# EAGLE board PCB - BOARD (EAGLE 8.2.0)
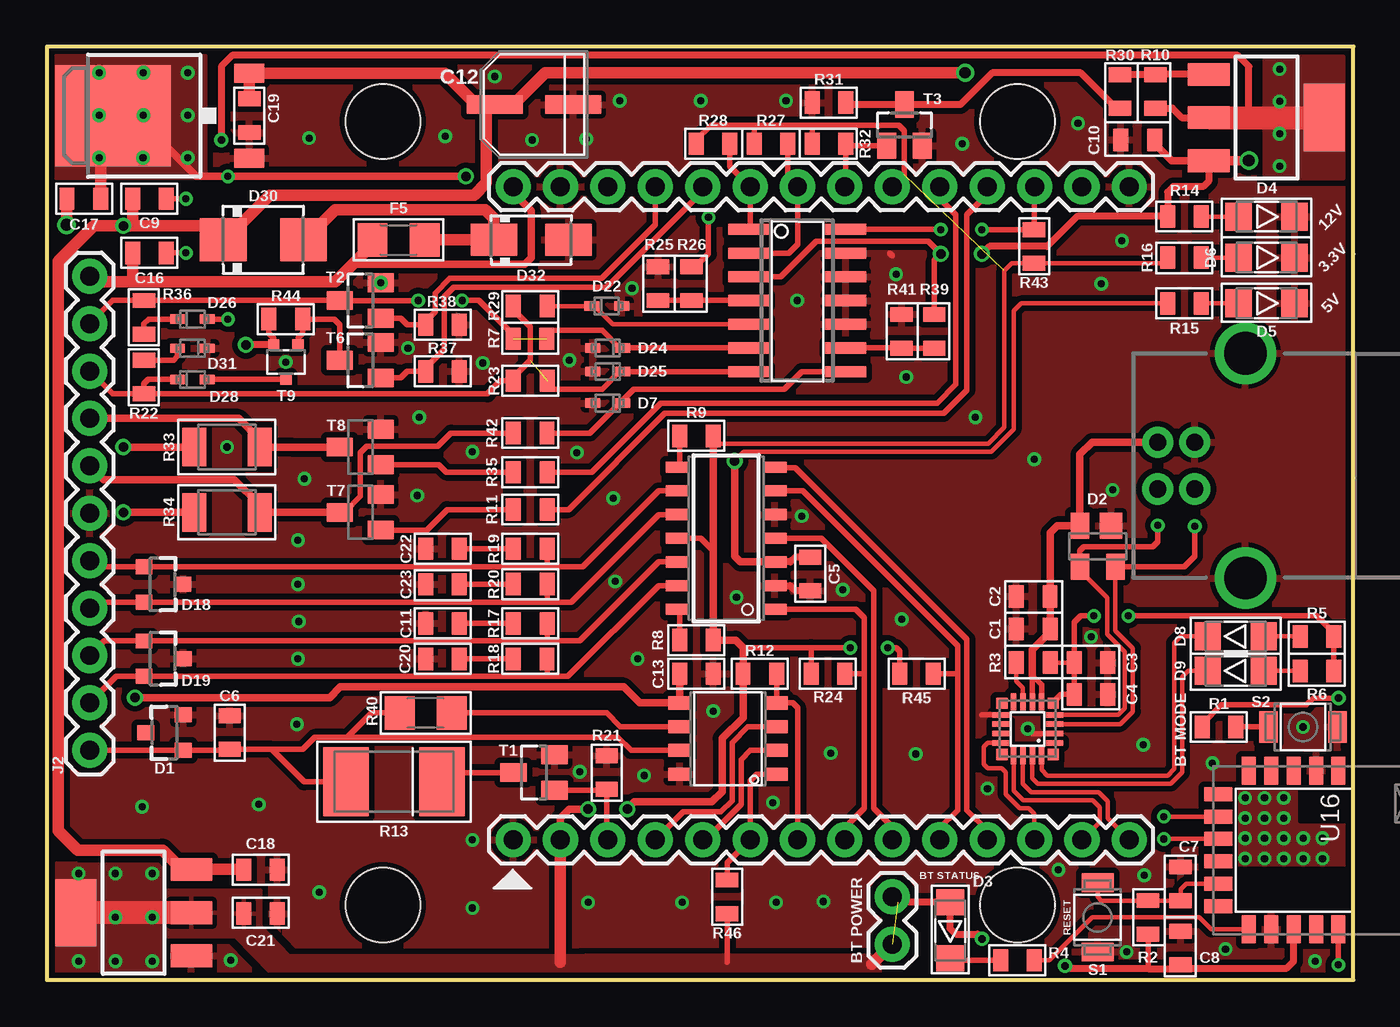
[diagram p0: board, top side]
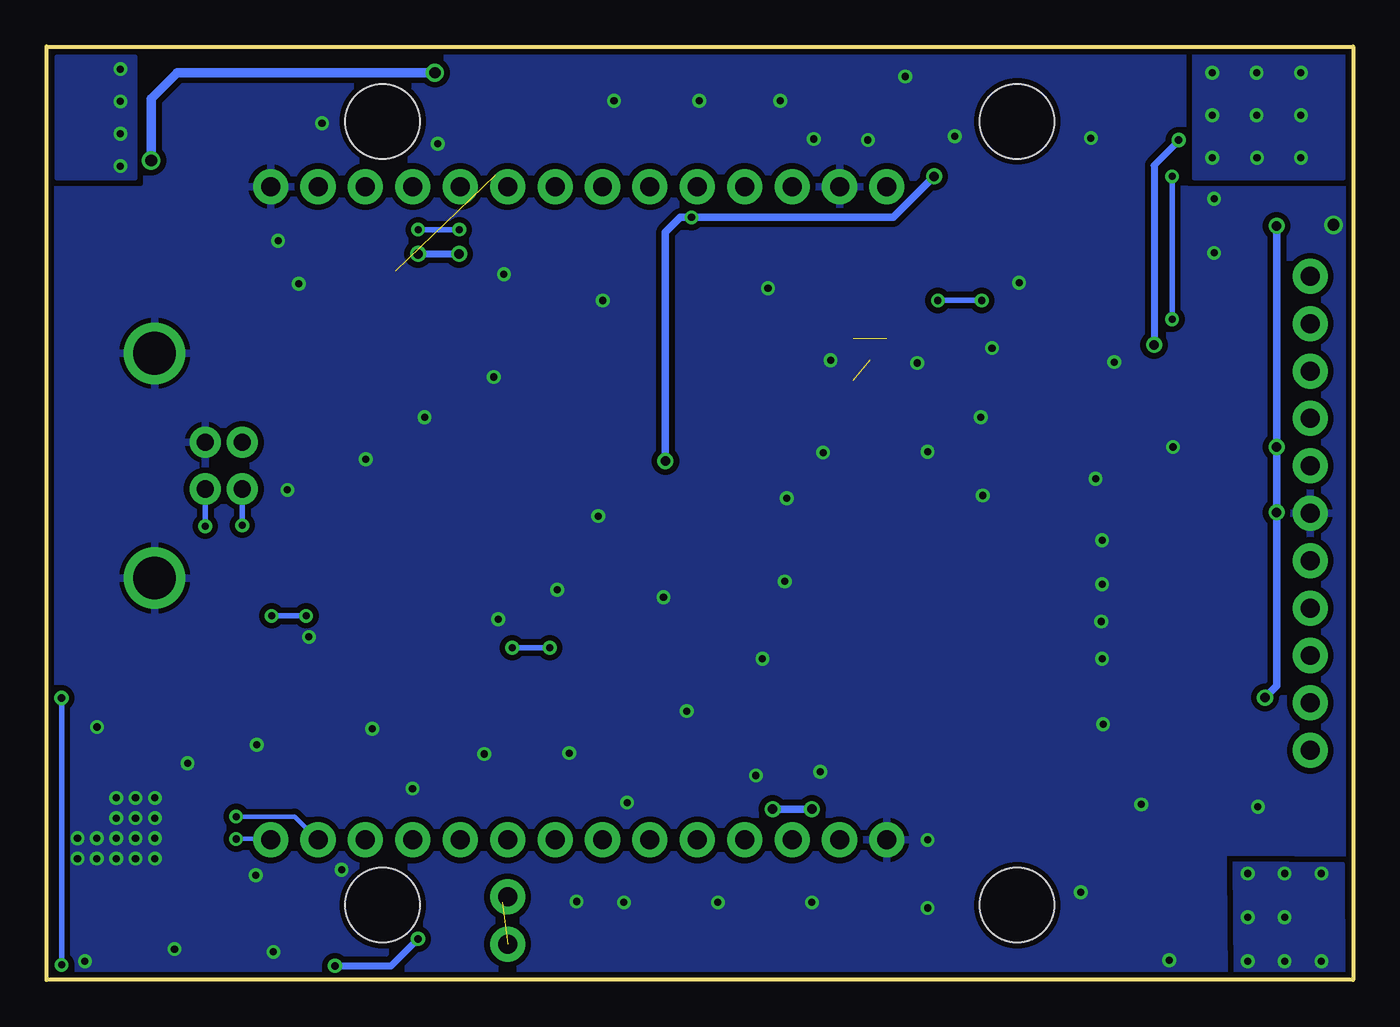
[diagram p1: board, bottom side, seen from below]

Size 70 x 50 mm. Coordinates in mm from the lower left corner, seen from the top.
Outline: 0,0 70,0 70,50 0,50 0,0
Copper layers (1*16): Top 0.035mm / dielectric 1.5mm / Bottom 0.035mm
Design rules "SparkFun-2-layer-TIGHT": minimum track width 7mil, minimum drill 15mil, track to track 7mil, track to pad 7mil, pad to pad 7mil, via to via 7mil, smd to smd 7mil, copper to edge 7mil, drill to drill 7mil, minimum pad ring 7mil, minimum via ring 7mil, stop-mask expansion 4mil, vias tented up to drill 25mil, thermal gap 10mil
Holes 4 mm at 52,46 18,46 18,4 52,4

## Footprints (pad centres in the part's own frame; a part is rotated, then mirrored left to right if it is on the bottom)
0805 = smd 0.8 x 1.2: 1 -0.9,0; 2 0.9,0
PANASONIC-C = smd 3 x 1: 1 -2.1,0; 2 2.1,0
QFN20 = smd 0.6 x 0.6: 1 -1.37,1.37; 6 -1.37,-1.37; 11 1.37,-1.37; 16 1.37,1.37 | smd 0.9 x 0.3: 2 -1.445,0.75; 3 -1.445,0.25; 4 -1.445,-0.25; 5 -1.445,-0.75; 12 1.445,-0.75; 13 1.445,-0.25; 14 1.445,0.25; 15 1.45,0.75 | smd 0.3 x 0.9: 7 -0.75,-1.445; 8 -0.25,-1.445; 9 0.25,-1.445; 10 0.75,-1.445; 17 0.75,1.445; 18 0.25,1.445; 19 -0.25,1.445; 20 -0.75,1.445
SOT23-3 = smd 0.8 x 0.9: 1 -0.95,-1; 2 0.95,-1; 3 0,1
SOT143-4 = smd 1.2 x 1.4: 1 -0.725,-1.1 | smd 1 x 1.4: 2 0.95,-1.1; 3 0.95,1.1; 4 -0.95,1.1
WL-SMCW_1206 = smd 1.4 x 1.5: 1 -1.5,0; 2 1.5,0
SOD-523F = smd 0.8 x 0.5: A -0.8,0; C 0.8,0
SOT23-3' = smd 0.8 x 0.9: 1 -0.95,-1; 2 0.95,-1; 3 0,1.1
DO214AA = smd 2.5 x 2.3: A 2.15,0; C -2.15,0
DO214AC = smd 2.5 x 1.7: A 2,0; C -2,0
1206 = smd 1.6 x 1.8: 1 -1.4,0; 2 1.4,0
SO14 = smd 0.6 x 2.2: 1 -3.81,-2.6; 2 -2.54,-2.6; 3 -1.27,-2.6; 4 0,-2.6; 5 1.27,-2.6; 6 2.54,-2.6; 7 3.81,-2.6; 8 3.81,2.6; 9 2.54,2.6; 10 1.27,2.6; 11 0,2.6; 12 -1.27,2.6; 13 -2.54,2.6; 14 -3.81,2.6
1X11 = drill 1.016 pad 1.88: 1 0,0; 2 2.54,0; 3 5.08,0; 4 7.62,0; 5 10.16,0; 6 12.7,0; 7 15.24,0; 8 17.78,0; 9 20.32,0; 10 22.86,0; 11 25.4,0
USB-B-PTH = drill 0.914 pad 1.676: D+ 4,1.25; D- 5.981,1.25; GND 4,-1.25; VBUS 5.981,-1.25 | drill 2.286: SHLD1 1.282,-6.02; SHLD2 1.282,6.02
1X02 = drill 1.016 pad 1.88: 1 0,0; 2 2.54,0
1X14 = drill 1.016 pad 1.88: 1 0,0; 2 2.54,0; 3 5.08,0; 4 7.62,0; 5 10.16,0; 6 12.7,0; 7 15.24,0; 8 17.78,0; 9 20.32,0; 10 22.86,0; 11 25.4,0; 12 27.94,0; 13 30.48,0; 14 33.02,0
3521 = smd 2.45 x 3.7: 1 -2.575,0; 2 2.575,0
1210 = smd 1.27 x 2.06: 1 -1.755,0; 2 1.755,0
B3U-WO-GT-WO-B = smd 1 x 1.7: 1 -1.85,0; 2 1.85,0
SOT23 = smd 1 x 1.4: 1 -0.95,-1.1; 2 0.95,-1.1; 3 0,1.1
SOT23-BEC = smd 1 x 1.4: B -0.95,-1.1; C 0,1.1; E 0.95,-1.1
SOT323 = smd 0.6 x 0.6: 1 -0.65,-0.925; 2 0.65,-0.925; 3 0,0.925
SO14' = smd 0.6 x 1.3: 1 -3.81,-2.6; 2 -2.54,-2.6; 3 -1.27,-2.6; 4 0,-2.6; 5 1.27,-2.6; 6 2.54,-2.6; 7 3.81,-2.6; 8 3.81,2.6; 9 2.54,2.6; 10 1.27,2.6; 11 0,2.6; 12 -1.27,2.6; 13 -2.54,2.6; 14 -3.81,2.6
SOT223 = smd 1.219 x 2.235: 1 -2.311,-3.099; 2 0,-3.099; 3 2.311,-3.099 | smd 3.6 x 2.2: 4 0,3.099
SOIC-8 = smd 0.7 x 1.2: 1 -1.905,-2.6; 2 -0.635,-2.6; 3 0.635,-2.6; 4 1.905,-2.6; 5 1.905,2.6; 6 0.635,2.6; 7 -0.635,2.6; 8 -1.905,2.6
TO-252 = smd 1 x 1.6: 1 -2.28,-4.8; 3 2.28,-4.8 | smd 5.4 x 6.2: 2 0,2.5
RN4871 = smd 1.5 x 0.75: 1 -4.25,0.95; 2 -4.25,-0.25; 3 -4.25,-1.45; 4 -4.25,-2.65; 5 -4.25,-3.85; 12 4.25,-3.85; 13 4.25,-2.65; 14 4.25,-1.45; 15 4.25,-0.25; 16 4.25,0.95 | smd 0.75 x 1.5: 6 -3,-5.5; 7 -1.8,-5.5; 8 -0.6,-5.5; 9 0.6,-5.5; 10 1.8,-5.5; 11 3,-5.5

## Placement (x,y rotation side)
C1  4.7uF  [0805]  52.85,18.8 180 top
C2  0.1uF  [0805]  52.85,20.55 180 top
C3  4.7uF  [0805]  55.95,17 0 top
C4  0.1uF  [0805]  55.95,15.3 0 top
C5  100nF  [0805]  40.9,21.75 270 top
C6  150pF  [0805]  9.8,13.25 90 top
C7  1uF 6.3v  [0805]  60.75,5.15 90 top
C8  10uF 6.3V X5R  [0805]  60.75,1.7 90 top
C9  0.1uF 25V  [0805]  5.5,41.85 0 top
C10  0.1uF 25V  [0805]  58.45,45 180 top
C11  560pF  [0805]  21.2,19.1 180 top
C12  EEE-1EA330WR  [PANASONIC-C]  26.1,46.9 180 top
C13  4.7uF 25V  [0805]  34.8,16.4 0 top
C16  10nF 100V  [0805]  5.5,38.95 0 top
C17  4.7uF  [0805]  1.98,41.85 180 top
C18  4.7uF MLCC  [0805]  11.45,5.9 0 top
C19  10uF  [0805]  10.85,46.3 270 top
C20  560pF  [0805]  21.2,17.2 180 top
C21  4.7uF MLCC  [0805]  11.45,3.55 0 top
C22  560pF  [0805]  21.2,23.1 180 top
C23  560pF  [0805]  21.2,21.2 180 top
CP1202N  CP2102N  [QFN20]  52.55,13.45 180 top
D1  MMBZ27  [SOT23-3]  6.3,13.24 90 top
D2  SP0503BAHTG  [SOT143-4]  56.3,23.23 180 top
D3  [WL-SMCW_1206]  48.4,2.65 90 top
D4  1120  [WL-SMCW_1206]  65.35,40.9 180 top
D5  330  [WL-SMCW_1206]  65.35,36.25 180 top
D6  330  [WL-SMCW_1206]  65.35,38.7 180 top
D7  BAT54XV2  [SOD-523F]  30.05,30.9 0 top
D8  [WL-SMCW_1206]  63.7,18.4 0 top
D9  [WL-SMCW_1206]  63.7,16.55 0 top
D18  PESD1CAN  [SOT23-3']  6.2,21.19 270 top
D19  PESD1CAN  [SOT23-3']  6.21,17.21 270 top
D22  BAT54XV2  [SOD-523F]  30,36.1 180 top
D24  BAT54XV2  [SOD-523F]  30.05,33.85 0 top
D25  BAT54XV2  [SOD-523F]  30.05,32.6 0 top
D26  BAT54XV2  [SOD-523F]  7.8,35.4 180 top
D28  BAT54XV2  [SOD-523F]  7.8,32.17 180 top
D30  S2A  [DO214AA]  11.6,39.65 0 top
D31  BAT54XV2  [SOD-523F]  7.8,33.84 0 top
D32  SMAJ15CA  [DO214AC]  25.95,39.65 0 top
F5  MF-NSMF020-2  [1206]  18.85,39.65 0 top
IC2  LM339D  [SO14]  40.2,36.4 270 top
J2  [1X11]  2.3,12.3 90 top
J3  USB_B_PTH  [USB-B-PTH]  65.5,27.55 180 top
J4  [1X02]  45.3,4.45 270 top
J5  [1X14]  58,7.5 180 top
J6  [1X14]  58,42.5 180 top
R1  4.7k 1%  [0805]  62.8,13.55 180 top
R2  4.7k  [0805]  59,3.35 270 top
R3  1K  [0805]  52.85,17 180 top
R4  330  [0805]  52,1.05 180 top
R5  330  [0805]  68.05,18.4 0 top
R6  330  [0805]  68.05,16.55 0 top
R7  10k  [0805]  25.89,34.35 0 top
R8  10k  [0805]  34.8,18.2 0 top
R9  10k  [0805]  34.8,29.15 0 top
R10  240  [0805]  59.4,47.6 270 top
R11  1k  [0805]  25.9,25.2 180 top
R12  1k  [0805]  38.2,16.4 180 top
R13  3521130RFT  [3521]  18.6,10.61 180 top
R14  1240  [0805]  60.95,40.9 180 top
R15  280  [0805]  60.95,36.25 180 top
R16  120  [0805]  60.95,38.7 180 top
R17  100  [0805]  25.9,19.1 0 top
R18  100  [0805]  25.9,17.2 0 top
R19  100  [0805]  25.9,23.1 0 top
R20  100  [0805]  25.9,21.2 0 top
R21  10k  [0805]  30,11.11 90 top
R22  10k  [0805]  5.2,32.3 270 top
R23  10k  [0805]  25.9,32.1 180 top
R24  1k  [0805]  41.85,16.4 180 top
R25  8k  [0805]  32.75,37.3 270 top
R26  2k  [0805]  34.55,37.3 90 top
R27  10k  [0805]  38.8,44.8 180 top
R28  10k  [0805]  35.7,44.8 180 top
R29  10k  [0805]  25.9,36.1 0 top
R30  866  [0805]  57.5,47.6 90 top
R31  374  [0805]  41.9,47 0 top
R32  100k  [0805]  41.9,44.8 180 top
R33  510 0.5W  [1210]  9.65,28.55 180 top
R34  510 0.5W  [1210]  9.65,25.05 180 top
R35  1k  [0805]  25.9,27.2 180 top
R36  10k  [0805]  5.2,35.5 270 top
R37  100k  [0805]  21.2,32.6 180 top
R38  100k  [0805]  21.2,35.1 180 top
R39  10k  [0805]  47.55,34.75 90 top
R40  6.49k 0.12W  [1206]  20.3,14.3 180 top
R41  10k  [0805]  45.8,34.75 270 top
R42  10k  [0805]  25.9,29.3 0 top
R43  10k  [0805]  52.9,39.3 270 top
R44  1.5k  [0805]  12.8,35.4 180 top
R45  1k  [0805]  46.6,16.4 180 top
R46  1k  [0805]  36.45,4.45 270 top
S1  [B3U-WO-GT-WO-B]  56.3,3.35 90 top
S2  [B3U-WO-GT-WO-B]  67.3,13.55 180 top
T1  2N7002P  [SOT23]  26.1,11.11 90 top
T2  2N7002P  [SOT23]  16.8,36.4 90 top
T3  2N7002P  [SOT23]  45.95,45.8 0 top
T6  2N7002P  [SOT23]  16.8,33.2 90 top
T7  MMBT3904  [SOT23-BEC]  16.8,25.05 90 top
T8  MMBT3904  [SOT23-BEC]  16.8,28.55 90 top
T9  RU1E002SPTCL  [SOT323]  12.81,33.1 180 top
U1  TJA1048T  [SO14']  36.4,23.66 90 top
U9  LM317  [SOT223]  65.35,46.2 270 top
U10  TH8056-KDC-A8  [SOIC-8]  36.5,12.93 90 top
U15  NCP1117  [TO-252]  6.05,46.3 90 top
U16  BM71BLES1FC2  [RN4871]  68.25,6.95 270 top
U19  ZLDO1117  [SOT223]  4.65,3.6 90 top

## Library data of the parts
C1-C11 C13 C16-C23 = SparkFun-Capacitors; PROD_ID: CAP-11625
C12 CP1202N D1 D2 D7 D22 D24-D26 D28 D31 R13 U1 U10 U16 = prywatne
D3-D6 D8 D9 = EAGLE-COLOR_LED-rev17b
D18 D19 = SparkFun-DiscreteSemi; PROD_ID: DIO-12501
D30 = s2x_10; MF: Fairchild; MPN: S2A; OC_FARNELL: 1467485; OC_NEWARK: 58K2391
D32 = smaj_10; MF: Littelfuse; MPN: SMAJ15CA; OC_FARNELL: 1827670; OC_NEWARK: 71J1959
F5 = SparkFun-Fuses; PROD_ID: RES-11150
IC2 = linear
J2 J4-J6 = SparkFun-Connectors
J3 = SparkFun-Connectors; PROD_ID: CONN-08278; SF_ID: PRT-00139
R1-R12 R14-R32 R35-R39 R41-R46 = SparkFun-Resistors; PROD_ID: RES-11622
R33 R34 = SparkFun-Resistors; PROD_ID: RES-12374
R40 = SparkFun-Resistors; PROD_ID: RES-08705
S1 S2 U15 U19 = Goodies
T1-T3 T6 T9 = nxp_60
T7 T8 = transistor (2)
U9 = SparkFun-IC-Power

## Nets
3.3V: C8.1 C21.1 D3.2 J4.1 J4.2 J5.13 J6.6 R2.2 R8.2 R9.2 R12.2 R16.2 R24.2 R27.2 R28.2 R32.2 R43.2 R45.2 R46.2 U1.11 U16.14 U19.2 U19.4
5V: C5.1 C17.1 D26.A R15.2 R26.2 U1.3 U15.2
!ISO_K_TX: J6.4 R11.1
!ISO_L_TX: J6.5 R35.1
!ISO_RX: IC2.14 J6.3 R43.1
!J1850_BUS-_TX: J6.11 R38.2 T2.1
!UART_CTS: CP1202N.15 J5.3
ADJ: R10.1 R30.2 U9.1
COMPARATOR+: D22.C IC2.5 R29.2
COMPARATOR-: IC2.4 R25.2 R26.1
D+: CP1202N.4 D2.4 J3.D+
D-: CP1202N.5 D2.3 J3.D-
DLC: C9.1 C10.1 C12.2 C13.1 C18.1 C19.1 D30.C IC2.3 R14.2 R33.2 R34.2 R39.2 U9.3 U10.5 U15.3 U19.3
DLC_RAW: C16.1 F5.1 J2.11 J6.14
DLC_RAW2: D30.A D32.C F5.2
GND: C1.2 C2.2 C3.2 C4.2 C5.2 C6.2 C7.2 C8.2 C9.2 C10.2 C11.2 C12.1 C13.2 C16.2 C17.2 C18.2 C19.2 C20.2 C21.2 C22.2 C23.2 CP1202N.3 CP1202N.12 D1.2 D2.1 D4.1 D5.1 D6.1 D7.A D18.3 D19.3 D22.A D24.A D25.A D31.C D32.A IC2.10 IC2.11 IC2.12 IC2.13 J2.6 J3.GND J3.SHLD1 J3.SHLD2 J5.14 J6.1 J6.13 R21.2 R25.1 R31.1 R37.1 R38.1 R41.1 S1.1 S2.1 T1.2 T2.2 T3.2 T6.2 T7.E T8.E U1.2 U1.5 U10.8 U15.1 U16.2 U16.13 U19.1
HS_CAN_H: D18.2 J2.4 R20.2 U1.10
HS_CAN_L: D18.1 J2.5 R19.2 U1.9
HS_CAN_RX: J5.4 U1.7
HS_CAN_TX: J5.5 R45.1 U1.6
J1850_BUS+: D25.C D28.C IC2.7 J2.9 R22.2 R23.1 R23.2 R29.1
J1850_BUS+_TX: J6.10 R37.2 T6.1
J1850_BUS-: D24.C IC2.6 J2.10 R7.1 R7.2 R36.1 T2.3
K-LINE: D7.C IC2.8 R42.2
K_LINE: J2.7 R34.1 R42.1 T7.C
L_LINE: J2.8 R33.1 T8.C
LED: R4.1 U16.12
LOAD: R40.1 U10.6
MS_CAN_H: D19.2 J2.2 R18.2 U1.13
MS_CAN_L: D19.1 J2.3 R17.2 U1.12
MS_CAN_RX: J5.6 U1.4
MS_CAN_TX: J5.7 R24.1 U1.1
N$1: R44.1 T6.3 T9.1
N$2: R1.1 S2.2
N$3: CP1202N.20 D8.1
N$5: D26.C R36.2
N$6: D3.1 R4.2
N$8: IC2.9 R39.1 R41.2
N$9: D28.A T9.3
N$11: D31.A R22.1
N$12: R35.2 T8.B
N$13: R13.1 T1.3
N$14: R11.2 T7.B
N$15: R30.1 R31.2 T3.3
N$17: C11.1 R17.1
N$25: C20.1 R18.1
N$26: C22.1 R19.1
N$27: C23.1 R20.1
N$29: D6.2 R16.1
N$30: D5.2 R15.1
N$32: D4.2 R14.1
N$39: C7.1 R2.1 S1.2 U16.10
N$42: R1.2 U16.16
N$45: CP1202N.9 R3.2
N$46: CP1202N.19 D9.1
N$47: D8.2 R5.1
N$49: D9.2 R6.1
PWM/!VPW: J6.7 R32.1 T3.1
PWM_RX: IC2.1 J6.9 R28.1
STBN_1: R8.1 U1.14
STBN_2: R9.1 U1.8
SW_CAN: C6.1 D1.1 J2.1 R13.2 R40.2 U10.7
SW_CAN_LOAD: J5.12 R21.1 T1.1
SW_CAN_MODE0: J5.10 U10.2
SW_CAN_MODE1: J5.11 U10.3
SW_CAN_RX: J5.8 R12.1 U10.4
SW_CAN_TX: J5.9 R46.1 U10.1
UART_RX: CP1202N.18 J5.1 U16.8
UART_TX: CP1202N.17 J5.2 U16.7
V_J1850: R10.2 R44.2 T9.2 U9.2 U9.4
VBUS: C1.1 C2.1 CP1202N.7 CP1202N.8 D2.2 J3.VBUS
VDD_CP: C3.1 C4.1 CP1202N.6 R3.1 R5.2 R6.2
VPW_RX: IC2.2 J6.8 R27.1

## Tracks (layer width: path | path; a pad name or v marks a point on that pad's centre or on a via)
3.3V  (via drill 0.38, 0.41, 0.51)  (2 unrouted)
  Top 0.254: 35.75,27.75 35.7,27.8 | R43.2 | R43.2 | 35.7,28.75 35.72,28.73 50.43,28.73 51.3,29.6 51.3,38 51.7,38.4 R43.2 | R43.2 59.75,38.4 R16.2
  Top 0.305: R28.2 34.8,45 35.6,45.8 37.9,45.8 | U1.11 35.04,23.66 35.7,23 | 37.3,17.8 40.95,17.8 | 40.95,17.8 v43.05,17.8 | v45.05,17.8 45.5,17.8 45.7,17.6 R45.2 | 40.95,17.8 R24.2 | 40.95,45.8 37.9,45.8 | 40.95,45.8 45.65,45.8 45.95,45.5 45.95,43.15 J6.6 | R27.2 37.9,45.8 | R32.2 41,45.75 40.95,45.8 | R46.2 36.45,0.95 | R2.2 59,0.6 | R8.2
  Top 0.381: 35.7,27.8 | 35.7,27.8 | 27.52,7.64 J5.13 | U16.14 66.8,1 66.4,0.6 60.95,0.6 C8.1 60.75,0.6 59,0.6 54.7,0.6 v54.55,0.75 | v50.1,2.2 49.85,2.45 48.7,2.45 48.4,2.75 D3.2 45.6,4.15 J4.1 | R8.2
  Top 0.406: R12.2 37.3,17.8 36.9,18.2 R8.2 35.7,23 35.7,27.8 35.7,28.75 R9.2 | R12.2 | J5.13 27.52,8.67 28,9.15 v29,9.15 | v31.1,9.15 31.48,9.53 35.63,9.53 36.18,10.08 36.18,12.94 37.3,14.05 R12.2 | R28.2 34.75,44.85 34.7,44.8 | R9.2 | R28.2 34.8,44.6
  Top 0.508: R8.2
  Top 0.61: J5.13 27.52,0.97 27.5,0.95 | J4.2 45.26,1.91 44.2,0.85
  Top 1.22: U19.2 U19.4
  Bottom 0.305: v43.05,17.8 v45.05,17.8
  Bottom 0.381: v54.55,0.75 51.55,0.75 v50.1,2.2
  Bottom 0.406: v29,9.15 v31.1,9.15
  other vias: 5.65,5.7 3.67,5.7 3.67,1 5.65,1 1.7,1 1.7,5.7 3.67,3.35 5.65,3.35
  pour Top (isolate 0.305, no thermals): 6.2,6.23 0.52,6.23 0.52,0.33 6.2,0.33
  pour Bottom (isolate 0.305, no thermals): 6.35,6.28 0.57,6.23 0.52,0.33 6.3,0.38
  pour Top (isolate 0.305): 6.25,2.3 10.1,2.3 12,0.35 44.65,0.3 44.65,1.35 13,1.3 11.45,2.9 11.45,4.8 6.25,4.8
5V  (via drill 0.38, 0.51)
  Top 0.254: v36.85,27.8 37.35,28.3 50.61,28.3 51.8,29.49 51.8,35.85 52.2,36.25 R15.2
  Top 0.305: D26.A v9.7,35.4 | R26.2 | v35.45,40.85 35.45,38.9 34.75,38.2 R26.2
  Top 0.381: U1.3 39.84,22.39 40.1,22.65 C5.1
  Top 0.406: U1.3 37.16,22.39 36.85,22.7 v36.85,27.8 | 4.75,46.3 8,43.05 v9.7,43.05 v22.45,43.05
  Top 0.508: 5.5,46.3 4.75,46.3 U15.2
  Top 0.61: C17.1 2.88,43.97 v2.8,44.05
  Bottom 0.305: v9.7,35.4 v9.7,43.05
  Bottom 0.406: v22.45,43.05 24.65,40.85 v35.45,40.85 36.05,40.85 36.85,40.05 v36.85,27.8
  other vias: 2.8,48.6 5.17,48.6 7.55,48.6 2.8,46.33 5.17,46.33 5.15,44.05 7.55,46.33 7.55,44.05
  pour Top (isolate 0.305, no thermals): 0.5,49.5 8.5,49.5 8.5,42.95 0.5,42.95
  pour Bottom (isolate 0.305): 0.5,49.5 8.55,49.5 8.55,42.95 0.5,42.95
!ISO_K_TX
  Top 0.305: J6.4 50.38,42.08 49.3,41 49.3,31.6 48.05,30.35 33.1,30.35 27.95,25.2 R11.1 | 26.8,25.4 R11.1 | R11.1
!ISO_L_TX
  Top 0.305: J6.5 47.84,41.86 48.7,41 48.7,31.9 47.7,30.9 32.9,30.9 29.2,27.2 R35.1 | R35.1 | R35.1
!ISO_RX  (via drill 0.38)
  Top 0.305: R43.1 | v50.1,40.2 R43.1 | R43.1 52.9,42.48 J6.3 | IC2.14 v47.89,40.21 v47.9,40.2
  Bottom 0.305: v47.9,40.2 v50.1,40.2
!J1850_BUS-_TX
  Top 0.305: T2.1 18.95,35.45 19.3,35.1 R38.2 | R38.2 | R38.2 20.3,35.3 20.81,35.81 20.81,36.79 21.6,37.58 29.73,37.58 32.6,40.45 J6.11
!UART_CTS
  Top 0.254: CP1202N.15 50.4,12.7 50.2,12.5 50.2,11.55 50.4,11.35 51.15,11.35 51.37,11.13 51.37,9.95 52.13,9.19 52.61,9.19 52.9,8.9 52.9,7.52 J5.3
ADJ
  Top 0.381: 62.24,48.5 U9.1 59.41,48.51 R10.1 R30.2
COMPARATOR+
  Top 0.254: IC2.5 30.32,35.13 29.35,36.1 D22.C | R29.2 D22.C | D22.C
COMPARATOR-
  Top 0.305: R25.2 R26.1 IC2.4
D+  (via drill 0.38)
  Top 0.254: CP1202N.4 57.51,13.7 58.18,14.37 58.18,17.77 57.25,18.7 D2.4
  Top 0.305: D2.4 60.93,22.13 61.5,22.7 v61.5,24.3
  Bottom 0.305: J3.D+ v61.5,24.3
D-  (via drill 0.38)
  Top 0.254: CP1202N.5 57.4,14.2 57.75,14.55 57.75,17.59 56.82,18.52 56.82,20.48 55.35,21.95 D2.3
  Top 0.305: D2.3 55.35,23 55.55,23.2 59.25,23.2 59.52,23.47 v59.52,24.35
  Bottom 0.305: J3.D- v59.52,24.35
DLC  (via drill 0.51, 0.61, 0.64)
  Top 0.254: 50,38.8 v50.1,38.9 | U9.3 61.8,43.89 61.65,43.74
  Top 0.305: IC2.3 39.32,37.67 41.23,39.58 47.22,39.58 v47.9,38.9 47.55,38.55 R39.2
  Top 0.381: v50.1,38.9 50.5,39.3 53.6,39.3 55.2,40.9 R14.2 60.05,42.2 60.35,42.5 61.95,42.5 62.25,42.8 U9.3 62.15,43.79 | 61.6,43.79 61.55,43.84
  Top 0.406: 0.6,10.7 0.7,10.6 | C13.1 U10.5 31.77,14.84 30.9,15.7 15.72,15.7 15.15,15.12 v4.72,15.12 | 61.55,43.84 61.5,43.89 | 61.65,43.74 61.6,43.79 | U9.3 60.26,43.89 59.35,44.8 C10.1 | R34.2 v4.1,25.05 | R33.2 v4.1,28.55
  Top 0.508: v64.4,43.9 62.26,43.9 U9.3
  Top 0.61: U19.3 | U19.3 7.56,6.1 | U19.3 7.24,5.92 6.2,6.95 1.65,6.95 0.6,8 0.6,10.7 0.6,38.5 2.5,40.4 v4.1,40.4 4.65,40.4 | U19.3 10.54,5.92 C18.1 | D30.C 8.7,40.4 4.65,40.4 | D30.C 9.45,39.75 | 11.18,48.58 U15.3 | D30.C 9.55,39.65 11.95,42.05 22.9,42.05 23.55,42.7 23.55,46.6 23.85,46.9 C12.2 | C9.1 4.6,40.45 4.65,40.4 | U15.3 C19.1 | C19.1 | v49.2,48.6 26.7,48.6 25,46.9 C12.2 | U15.3 21.32,48.58 23,46.9 C12.2
  Bottom 0.381: v50.1,38.9 v47.9,38.9
  Bottom 0.406: v4.72,15.12 4.1,15.75 v4.1,25.05 v4.1,28.55 v4.1,40.4
  Bottom 0.508: v49.2,48.6 63,48.6 64.4,47.2 v64.4,43.9
DLC_RAW
  Top 0.406: J6.14 24.98,42.17 25.95,41.2 25.95,38.7 25.6,38.35 16.4,38.35 16.02,37.98
  Top 0.61: J2.11 2.6,37.4 4.65,37.4 | C16.1 4.6,37.45 4.65,37.4 | 4.65,37.4 15.45,37.4 16.02,37.98 17.45,39.4 F5.1
DLC_RAW2
  Top 0.61: F5.2 D32.C | D30.A 13.85,39.65 15.45,41.25 23.5,41.25 23.95,40.8 D32.C | D32.C 23.55,39.65
GND  (via drill 0.38, 0.64)
  Top 0.305: 9.75,14.2 C6.2 | IC2.13 | IC2.11 | 45.16,38.94 45.3,38.8 | C16.2 v7.45,38.95 | v7.45,38.95 | CP1202N.3 52.8,13.2 v52.55,13.45 | CP1202N.12 50.1,14.2 | C9.2 v7.45,41.85 | v7.45,41.85
  Top 0.381: 42.8,38.9 42.9,39 | 42.8,37.8 42.9,37.7 | 42.8,35.2 42.85,35.15 | U1.2 39.83,21.12 40.1,20.85 C5.2
  Top 0.406: 42.75,35.13 IC2.10
  Top 0.61: C17.2 1.08,40.48 v1.05,40.45
  other vias: 13.45,17.2 13.5,19.2 35.7,14.4 42.65,20.9 13.45,21.2 19.85,25.95 19.35,33.85 30.45,21.35 31.65,17.2 17.9,37.35 23.35,33.05 12.8,33.1 46.05,32.3 30.7,47.1 35.03,47.1 39.6,47.1 49.05,44.8 26,45 28.9,45.05 40.45,24.85 42,12.15 55.25,45.9 29,4.15 41.61,4.2 45.8,19.32 46.55,12.1 34.04,4.15 39.07,4.15 5.11,9.28 14.6,4.7 11.35,9.4 22.8,7.5 22.8,3.85 28.55,11.15 32,10.95 13.4,13.7 40.2,36.4 36.95,20.5 45.5,37.8 9.85,1.05 31.35,37.05 58.75,12.6 55.95,18.38 52.9,27.9 57.6,39.6 56.5,37.3 57.1,26.25 50.4,10.25 14.05,45.1 21.35,45.2 19.95,30.15 49.75,30.15 38.9,9.5 30.35,25.8 28.4,28.25 28,33.2 22.8,28.3 13.45,23.55 13.8,26.85 9.65,28.55 63.15,1.65 58.8,5.6 57.85,1.5 67.3,13.55 62.45,11.6 54.2,5.9 67.95,1 64.2,9.75 64.2,8.67 65.24,8.67 65.24,9.75 66.28,9.75 66.28,8.67 66.28,7.58 66.28,6.5 67.31,6.5 68.35,6.5 68.35,7.58 67.31,7.58 65.24,7.58 65.24,6.5 64.2,6.5 64.2,7.58 24,48.4
  pour Bottom (isolate 0.305, rank 2): -1,51 72,51 72,-1 -1,-1
  pour Top (isolate 0.305, rank 2): -2,52 73,52 73,-2 -2,-2
HS_CAN_H
  Top 0.305: 26.8,20.24 28.09,20.24 32.78,24.93 U1.10 | 26.8,20.24 D18.2 2.62,20.24 J2.4 | 26.8,20.24 R20.2 | R20.2
HS_CAN_L
  Top 0.305: 26.8,22.14 D18.1 2.62,22.14 J2.5 | 26.8,22.14 28.72,22.14 32.78,26.2 U1.9 | 26.8,22.14 R19.2
HS_CAN_RX
  Top 0.305: J5.4 50.38,8.02 49.3,9.1 49.3,18.25 40.1,27.45 39.02,27.45 U1.7
HS_CAN_TX
  Top 0.305: J5.5 47.84,8.14 48.8,9.1 48.8,16.4 | 39.04,26.16 U1.6 40.5,26.2 48.8,17.9 48.8,16.4 | 48.8,16.4 R45.1
J1850_BUS+  (1 unrouted)
  Top 0.305: 37.59,32.6 IC2.7 30.86,32.59 D25.C | R22.2 3.52,31.4 J2.9 | R22.2 5.2,31.95 5.42,32.17 D28.C | 26.8,31.95 R23.1 26.8,31.65 29.2,31.65 | R22.2 23.6,31.4 24.3,32.1 R23.2 25,32.3 25.9,33.2 25.9,35 25,35.9 R29.1 | 29.45,31.65 29.2,31.65 | 30.75,32.6 D25.C | 29.2,31.65 29.75,31.65 30.7,32.6 D25.C
J1850_BUS+_TX
  Top 0.305: T6.1 18.95,32.25 19.3,32.6 R37.2 | R37.2 | J6.10 35.14,42.24 30,37.1 21.8,37.1 21.29,36.59 21.29,33.79 20.3,32.8 R37.2
J1850_BUS-  (via drill 0.38)  (1 unrouted)
  Top 0.305: T2.3 R36.1 3.54,36.4 J2.10 | T2.3 | T2.3 | v19.9,36.4 T2.3 | v19.9,36.4 | v22.25,36.4 23.15,36.4 25,34.55 R7.1 | R7.2 26.8,34.8 29.1,34.8 | 29.1,34.8 29.25,34.8 | IC2.6 D24.C 30.7,33.85 29.75,34.8 29.1,34.8
  Bottom 0.305: v19.9,36.4 v22.25,36.4
K-LINE
  Top 0.305: IC2.8 | 26.8,29.45 R42.2 29.1,29.3 30.7,30.9 | 30.7,30.9 D7.C | 30.7,30.9 31.45,31.65 38.5,31.65 | 38.5,31.65 38.7,31.65 | IC2.8 40.44,32.59 39.5,31.65 38.5,31.65
K_LINE
  Top 0.305: T7.C 15.95,25.05 16.8,25.9 16.8,28.25 17.15,28.6 20.95,28.6 21.65,29.3 R42.1
  Top 0.406: T7.C R34.1 11.4,25.45 10.05,26.8 3.04,26.8 J2.7
L_LINE
  Top 0.406: 13.1,28.55 R33.1 11.4,28.95 10.27,30.08 J2.8 | 13.1,28.55 | 13.1,28.55 T8.C
LED
  Top 0.254: U16.12 62.4,2.7 61.75,3.35 56,3.35 53.7,1.05 R4.1
LOAD
  Top 0.305: U10.6 30.73,13.56 30,14.3 R40.1
MS_CAN_H
  Top 0.305: U1.13 32.78,21.12 27.92,16.26 26.8,16.26 | 26.8,16.26 D19.2 3.72,16.26 J2.2 | 26.8,16.26 R18.2
MS_CAN_L
  Top 0.305: U1.12 32.78,22.39 28.55,18.16 26.8,18.16 | 26.8,18.16 D19.1 3.08,18.16 J2.3 | 26.8,18.16 R17.2 | R17.2
MS_CAN_RX
  Top 0.305: J5.6 45.3,8.2 44.3,9.2 44.3,20.85 41.49,23.66 U1.4
MS_CAN_TX
  Top 0.305: J5.7 42.76,8.16 43.8,9.2 43.8,10 43.8,16.35 | 43.8,16.35 43.8,19.4 43.35,19.85 U1.1 | R24.1 43.75,16.4 43.8,16.35
N$1
  Top 0.305: 15.7,34.4 T6.3 | R44.1 | 15.7,34.4 15.7,35.1 15.4,35.4 R44.1 | 15.7,34.4 | T9.1 13.46,34.41 13.7,34.65 R44.1 | R44.1
N$2
  Top 0.305: R1.1 S2.2
N$3
  Top 0.254: CP1202N.20 53.3,11.25 53.6,10.95 60.05,10.95 60.4,11.3 60.4,18.05 60.75,18.4 D8.1
N$5
  Top 0.305: R36.2 5.2,35.15 5.45,35.4 D26.C
N$6
  Top 0.254: R4.2
  Top 0.305: R4.2 48.5,1.05 D3.1
N$8
  Top 0.305: IC2.9 R41.2 R39.1
N$9
  Top 0.305: T9.3 D28.A
N$11
  Top 0.305: D31.A 7,33.4 6.8,33.2 R22.1
N$12
  Top 0.305: R35.2 24.95,27.15 24.9,27.2 21.4,27.2 21,27.6 T8.B | R35.2
N$13
  Top 0.305: T1.3 | T1.3 21.68,11.11 R13.1
N$14
  Top 0.305: T7.B 20.35,24.1 21.45,25.2 24.9,25.2 24.95,25.15
  Top 0.406: 18.15,24.1 T7.B | 24.95,25.15 R11.2
N$15
  Top 0.381: R30.1 57.3,46.7 55.4,48.6 50.65,48.6 49.65,47.6 48.95,46.9 T3.3 42.9,46.9 R31.2
N$17
  Top 0.305: C11.1 R17.1
N$20
  cutout Top: 63.75,5.95 69.55,5.95 69.55,3.7 63.75,3.7
N$25
  Top 0.305: C20.1 R18.1 | R18.1
N$26
  Top 0.305: C22.1 R19.1
N$27
  Top 0.305: C23.1 R20.1
N$29
  Top 0.254: R16.1 D6.2 | D6.2
N$30
  Top 0.254: D5.2 R15.1
N$32
  Top 0.254: D4.2 R14.1
N$39
  Top 0.254: S1.2 56.3,4.45 56.5,4.25 R2.1 C7.1 60.75,4.85 61.05,5.15 U16.10
N$42  (via drill 0.38, 0.41)
  Top 0.305: U16.16 v69.2,0.8 | R1.2 | R1.2 61.9,13.7 62.93,14.73 67.48,14.73 67.85,15.1 v69.2,15.1
  Bottom 0.305: v69.2,0.8 v69.2,15.1
N$45
  Top 0.254: CP1202N.9 52.3,15.65 51.95,16 R3.2 | R3.2
N$46
  Top 0.254: CP1202N.19 52.8,10.8 53.08,10.52 60.23,10.52 60.83,11.12 60.83,16.23 61.15,16.55 D9.1
N$47
  Top 0.254: D8.2 R5.1
N$49
  Top 0.254: D9.2 R6.1
N$57
  cutout Top: 0.55,42.45 0.5,37.9 7.95,37.9 8,42.45
N$58
  cutout Top: 67.15,10.35 69.55,10.35 69.55,8.5 67.15,8.5
PWM/!VPW
  Top 0.305: J6.7 42.8,42.54 R32.1 42.9,44.7 T3.1
PWM_RX
  Top 0.305: IC2.1 37.68,40.29 J6.9 36.6,43.58 R28.1
STBN_1
  Top 0.305: R8.1 33.9,19.75 U1.14
STBN_2
  Top 0.305: R9.1 33.9,27.57 U1.8
SW_CAN
  Top 0.305: J2.1 D1.1 9.75,12.29 C6.1 12.05,12.35 | U10.7 31.3,12.3 30.6,13 16.1,13 | 12.05,12.35 13.7,12.35 14.35,13 16.1,13 | R40.2 17.4,14.3 16.1,13 | R13.2 13.79,10.61 12.05,12.35
SW_CAN_LOAD
  Top 0.305: R21.1 29.95,10.16 | R21.1 30,7.56 J5.12 | 29.95,10.16 R21.1 | T1.1 30,10.16 R21.1
SW_CAN_MODE0
  Top 0.305: J5.10 35.3,7.5 37.2,9.4 37.2,11.8 37.7,12.29 U10.2
SW_CAN_MODE1
  Top 0.305: J5.11 34.1,9 36.12,9 36.72,9.6 36.72,12.71 37.56,13.56 U10.3
SW_CAN_RX
  Top 0.305: J5.8 40.22,14.58 39.97,14.84 U10.4 R12.1
SW_CAN_TX
  Top 0.305: U10.1 38.02,11.03 37.68,10.68 J5.9 36.45,6.27 R46.1
UART_RX  (via drill 0.38)
  Top 0.254: 52.34,11.96 CP1202N.18 52.3,10.5 52.75,10.05 56.35,10.05 56.83,9.57 56.83,8.67 J5.1 | U16.8 v59.85,7.55
  Bottom 0.254: v59.85,7.55 58.05,7.55 J5.1
UART_TX  (via drill 0.38)
  Top 0.254: J5.2 56.4,8.45 56.4,9.25 56.03,9.62 52.31,9.62 51.8,10.13 CP1202N.17 51.84,11.96 51.8,11.91 | U16.7 v59.85,8.75
  Bottom 0.254: J5.2 56.71,8.75 v59.85,8.75
V_J1850  (via drill 0.38, 0.4, 0.51)
  Top 0.305: T9.2 12.16,34.39 11.9,34.65 R44.2 | R44.2
  Top 0.381: U9.2 60.8,46.2 60.3,46.7 R10.2 | T9.2 v10.66,34.02 | 64.4,46.2 64.4,48.95 63.82,49.53 9.93,49.53 9.35,48.95 v9.35,45
  Top 1.225: U9.2 64.4,46.2 U9.4
  Bottom 0.381: v10.66,34.02 10.66,43.64 9.35,44.95 v9.35,45
  other vias: 66.05,48.8 66.05,47.07 66.05,45.33 66.05,43.6
  pour Bottom: 69.45,49.45 65.25,49.45 65.25,42.95 69.45,42.95
  pour Top (no thermals): 69.45,49.45 65.25,49.45 65.25,42.95 69.45,42.95
VBUS
  Top 0.305: CP1202N.8 52.8,16.3 53.3,15.8 CP1202N.7 | C1.1 53.75,18.65
  Top 0.406: C1.1 C2.1 arc45 C2.1 53.75,23.95 54.13,24.33 D2.2 55.35,28.15 56,28.8 J3.VBUS | 52.8,16.3 52.8,17.7 53.75,18.65
VDD_CP  (via drill 0.38)
  Top 0.254: R3.1 C3.1 55.05,17.15 | CP1202N.6 53.92,14.87
  Top 0.305: 53.92,14.87 54.35,15.3 C4.1 C3.1 55.05,19.15 55.4,19.5 v56.1,19.5 | R6.2 R5.2 68.95,18.6 68.05,19.5 v57.95,19.5
  Bottom 0.305: v57.95,19.5 v56.1,19.5
VPW_RX
  Top 0.305: IC2.2 39.74,38.94 40.22,39.42 J6.8 39.7,43.02 R27.1

## Text on the board
tPlace: 12V | 3.3V | 5V | BT MODE | BT STATUS | BT POWER | RESET